# EAGLE board AD5330_Breakout-Panel-v12 (EAGLE 6.5.0), part 1 of 2
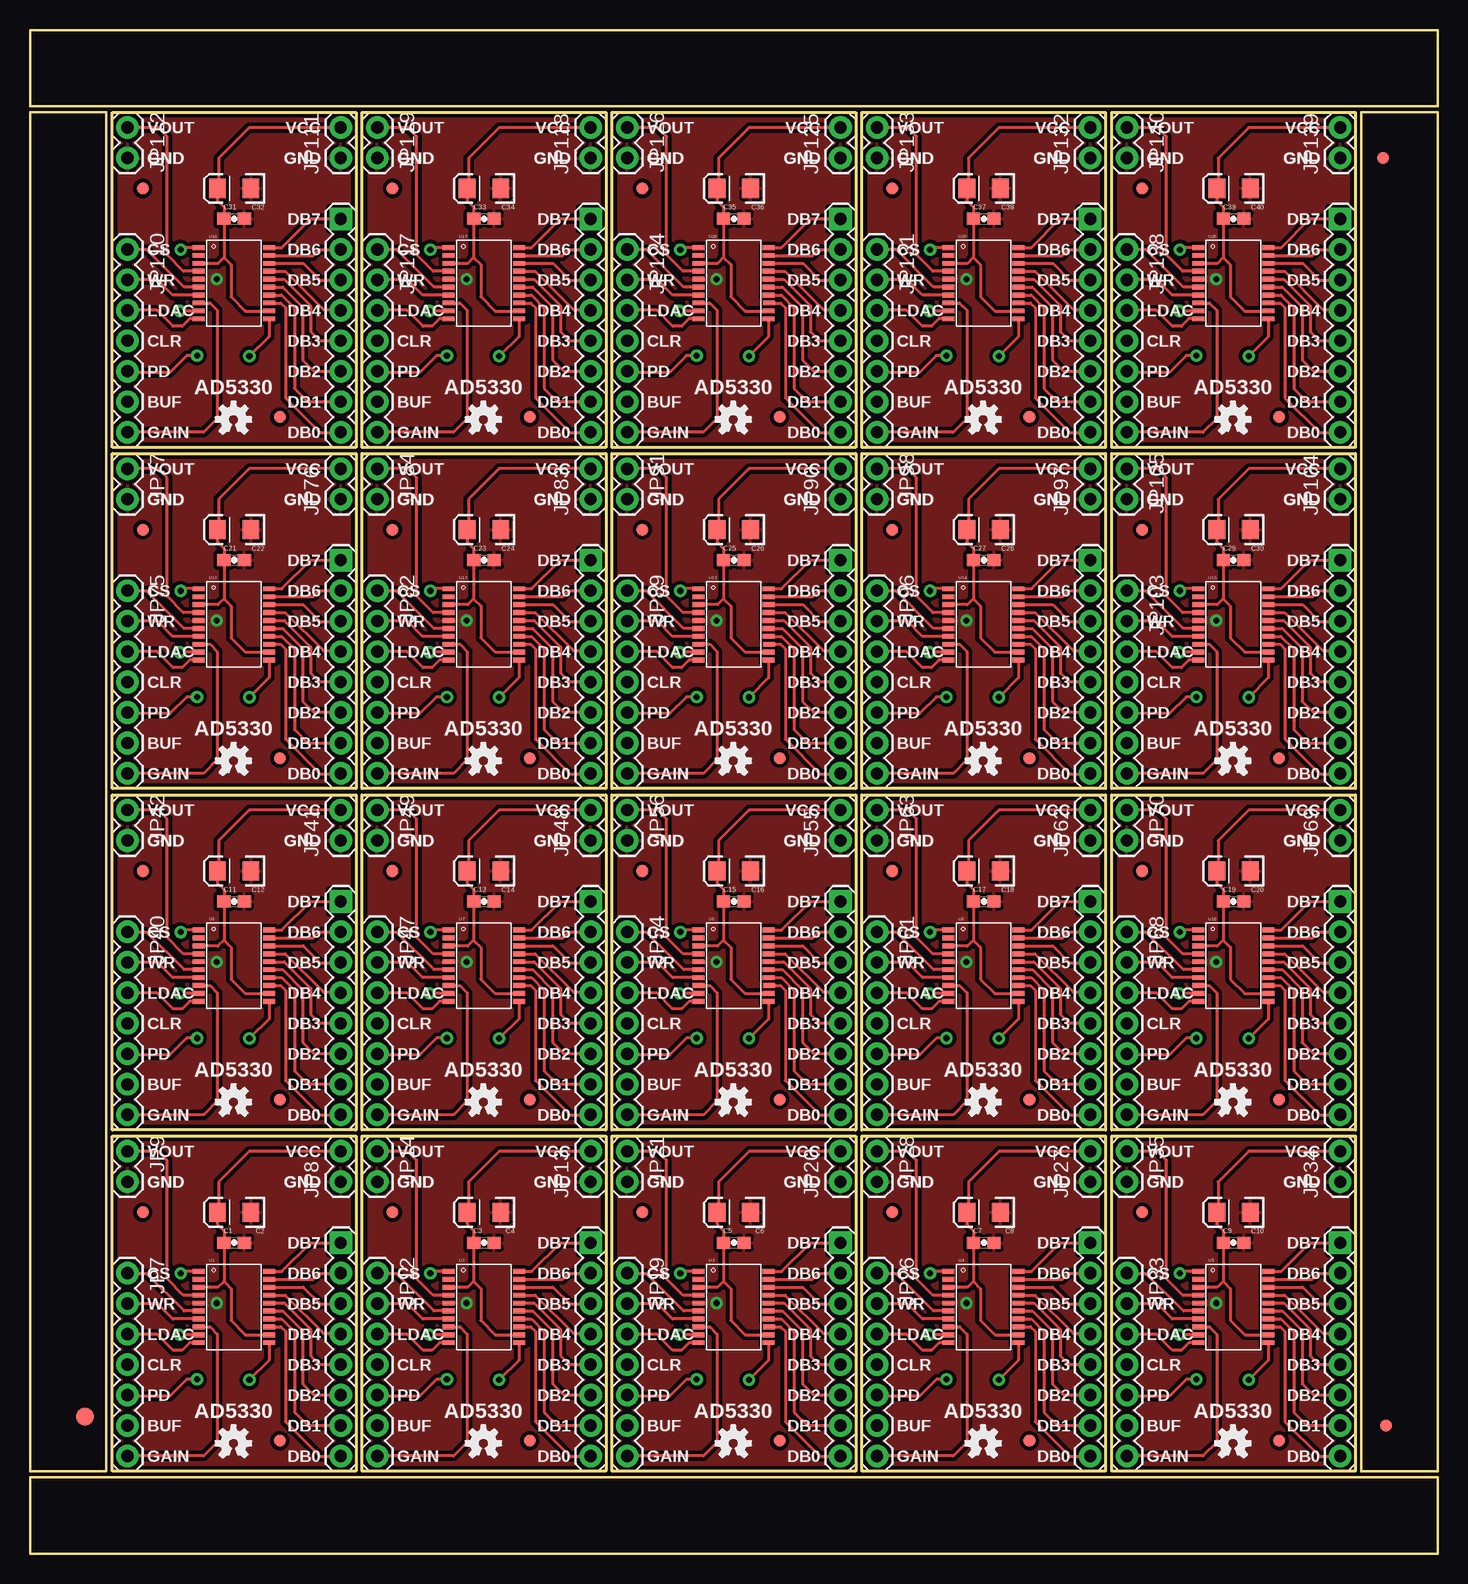
[diagram p0: board, top side]
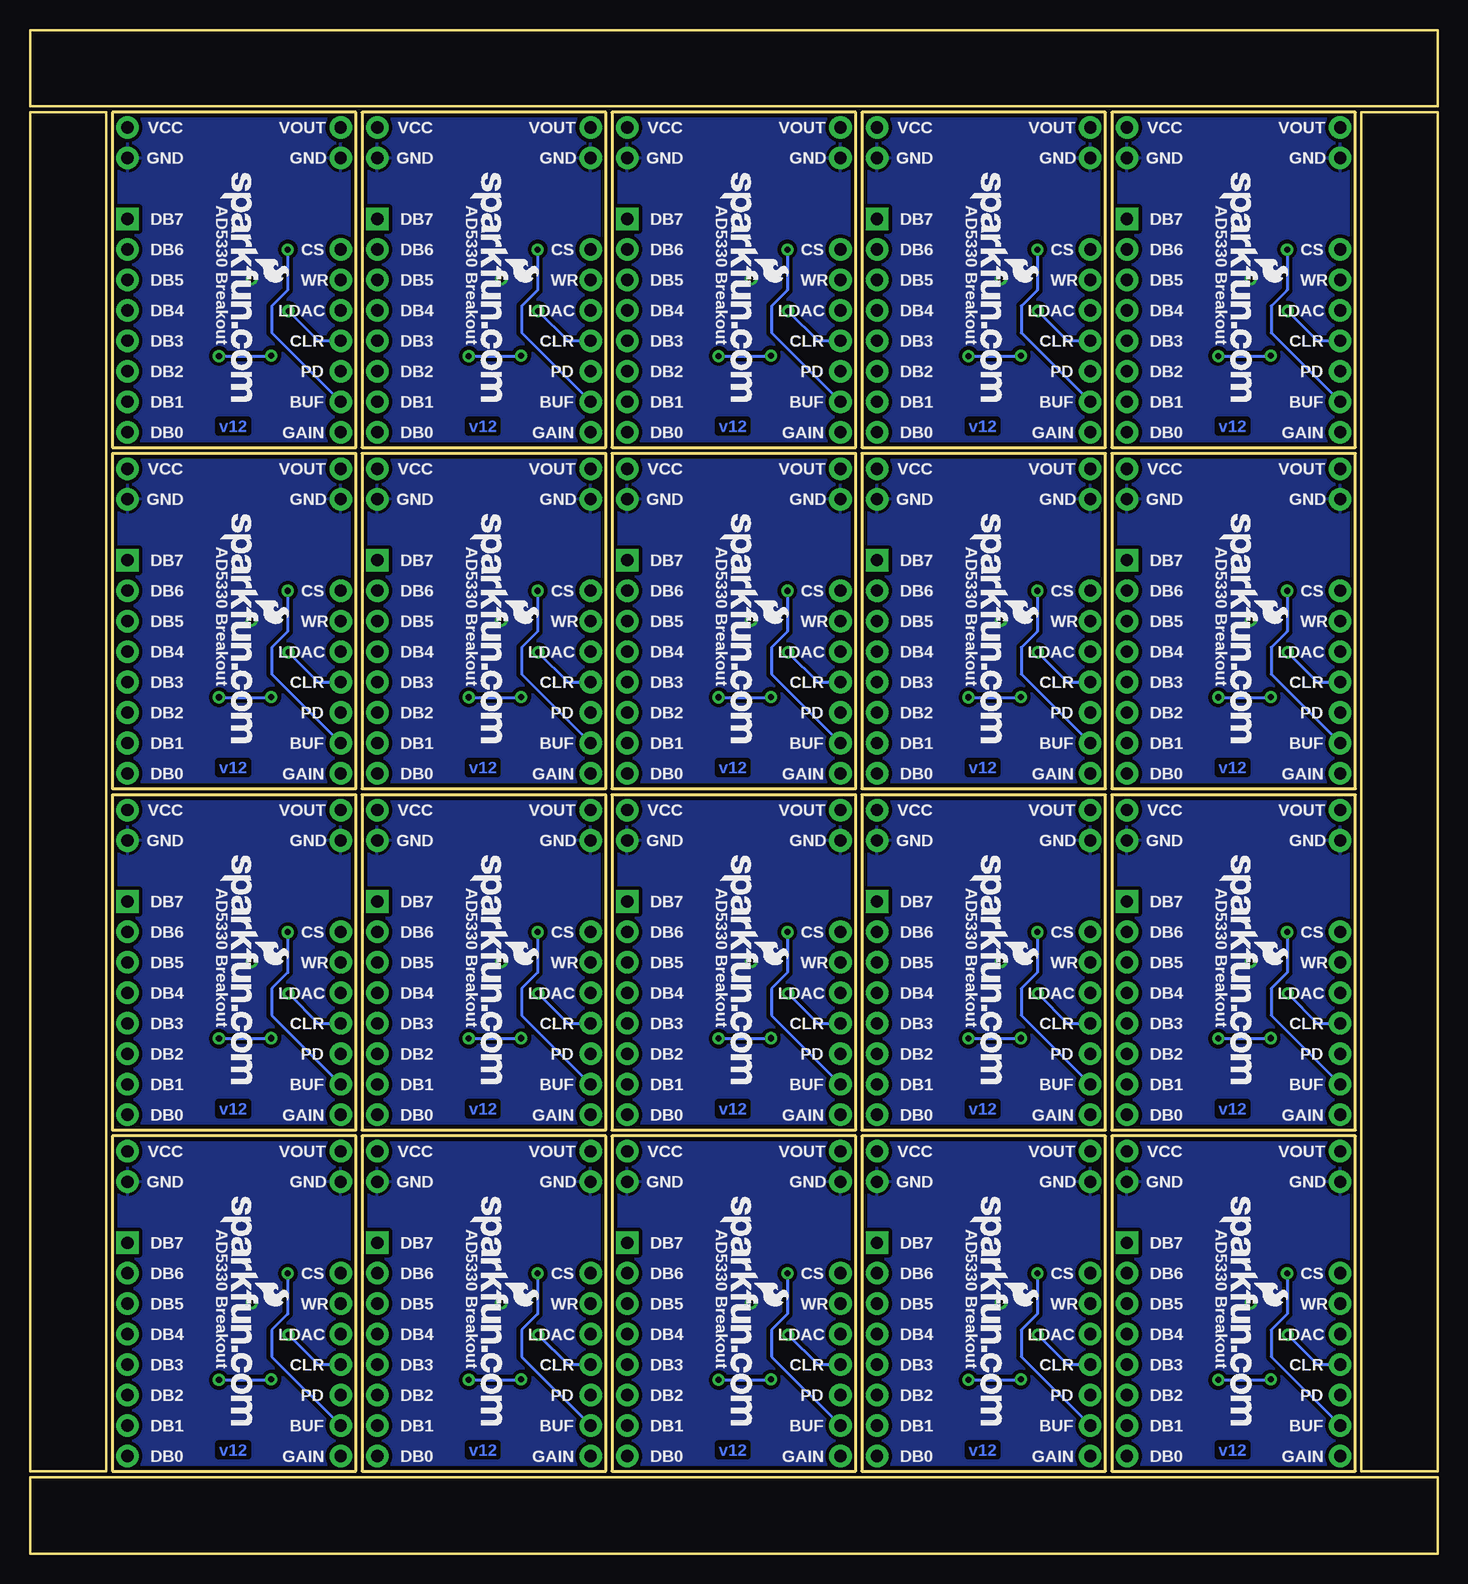
[diagram p1: board, bottom side, seen from below]

Size 117.35 x 127 mm. Coordinates in mm from the lower left corner, seen from the top.
Outline: 29.72,6.35 0,6.35 0,0 117.35,0 117.35,6.35 21.59,6.35
Outline: 87.63,120.65 117.35,120.65 117.35,127 0,127 0,120.65 95.76,120.65
Outline: 6.86,6.86 6.86,34.8 27.18,34.8 27.18,6.86 6.86,6.86
Outline: 27.69,6.86 27.69,34.8 48.01,34.8 48.01,6.86 27.69,6.86
Outline: 48.51,6.86 48.51,34.8 68.83,34.8 68.83,6.86 48.51,6.86
Outline: 69.34,6.86 69.34,34.8 89.66,34.8 89.66,6.86 69.34,6.86
Outline: 90.17,6.86 90.17,34.8 110.49,34.8 110.49,6.86 90.17,6.86
Outline: 6.86,35.31 6.86,63.25 27.18,63.25 27.18,35.31 6.86,35.31
Outline: 27.69,35.31 27.69,63.25 48.01,63.25 48.01,35.31 27.69,35.31
Outline: 48.51,35.31 48.51,63.25 68.83,63.25 68.83,35.31 48.51,35.31
Outline: 69.34,35.31 69.34,63.25 89.66,63.25 89.66,35.31 69.34,35.31
Outline: 90.17,35.31 90.17,63.25 110.49,63.25 110.49,35.31 90.17,35.31
Outline: 6.86,63.75 6.86,91.69 27.18,91.69 27.18,63.75 6.86,63.75
Outline: 27.69,63.75 27.69,91.69 48.01,91.69 48.01,63.75 27.69,63.75
Outline: 48.51,63.75 48.51,91.69 68.83,91.69 68.83,63.75 48.51,63.75
Outline: 69.34,63.75 69.34,91.69 89.66,91.69 89.66,63.75 69.34,63.75
Outline: 90.17,63.75 90.17,91.69 110.49,91.69 110.49,63.75 90.17,63.75
Outline: 6.86,92.2 6.86,120.14 27.18,120.14 27.18,92.2 6.86,92.2
Outline: 27.69,92.2 27.69,120.14 48.01,120.14 48.01,92.2 27.69,92.2
Outline: 48.51,92.2 48.51,120.14 68.83,120.14 68.83,92.2 48.51,92.2
Outline: 69.34,92.2 69.34,120.14 89.66,120.14 89.66,92.2 69.34,92.2
Outline: 90.17,92.2 90.17,120.14 110.49,120.14 110.49,92.2 90.17,92.2
Outline: 6.35,6.86 6.35,120.14 0,120.14 0,6.86 6.35,6.86
Outline: 117.35,6.86 117.35,120.14 111,120.14 111,6.86 117.35,6.86
Copper layers (1*16): Top 0.035mm / dielectric 1.5mm / Bottom 0.035mm
Design rules "SparkFun *": minimum track width 8mil, minimum drill 20mil, track to track 8mil, track to pad 8mil, pad to pad 8mil, via to via 8mil, smd to smd 8mil, copper to edge 8mil, drill to drill 8mil, minimum pad ring 12mil, minimum via ring 10mil, stop-mask expansion 4mil, vias tented up to drill 20mil, thermal gap 10mil

## Footprints (pad centres in the part's own frame; a part is rotated, then mirrored left to right if it is on the bottom)
0603-CAP = smd 1.1 x 1: 1 -0.85,0; 2 0.85,0
EIA3216 = smd 1.4 x 1.6: A 1.4,0; C -1.4,0
FIDUCIAL-1.5X3 = smd 1.5 x 1.5: 1 0,0
FIDUCIAL-1X2 = smd 1 x 1: 1 0,0
1X08 = drill 1.016 pad 1.88 square: 1 0,0 | drill 1.016 pad 1.88: 2 2.54,0; 3 5.08,0; 4 7.62,0; 5 10.16,0; 6 12.7,0; 7 15.24,0; 8 17.78,0
1X07 = drill 1.016 pad 1.88: 1 0,0; 2 2.54,0; 3 5.08,0; 4 7.62,0; 5 10.16,0; 6 12.7,0; 7 15.24,0
1X02 = drill 1.016 pad 1.88: 1 0,0; 2 2.54,0
TSSOP20 = smd 1 x 0.4: 1 -2.937,2.693; 2 -2.937,2.032; 3 -2.937,1.372; 4 -2.937,0.712; 5 -2.937,0.051; 6 -2.937,-0.609; 7 -2.937,-1.27; 8 -2.943,-1.93; 9 -2.937,-2.59; 10 -2.937,-3.251; 11 2.905,-3.251; 12 2.905,-2.59; 13 2.911,-1.93; 14 2.905,-1.27; 15 2.905,-0.609; 16 2.905,0.051; 17 2.905,0.712; 18 2.905,1.372; 19 2.905,2.032; 20 2.905,2.693

## Placement (x,y rotation side)
C1  0.1uF  [0603-CAP]  17.02,25.91 0 top
C2  10uF  [EIA3216]  17.02,28.45 180 top
C3  0.1uF  [0603-CAP]  37.85,25.91 0 top
C4  10uF  [EIA3216]  37.85,28.45 180 top
C5  0.1uF  [0603-CAP]  58.67,25.91 0 top
C6  10uF  [EIA3216]  58.67,28.45 180 top
C7  0.1uF  [0603-CAP]  79.5,25.91 0 top
C8  10uF  [EIA3216]  79.5,28.45 180 top
C9  0.1uF  [0603-CAP]  100.33,25.91 0 top
C10  10uF  [EIA3216]  100.33,28.45 180 top
C11  0.1uF  [0603-CAP]  17.02,54.36 0 top
C12  10uF  [EIA3216]  17.02,56.9 180 top
C13  0.1uF  [0603-CAP]  37.85,54.36 0 top
C14  10uF  [EIA3216]  37.85,56.9 180 top
C15  0.1uF  [0603-CAP]  58.67,54.36 0 top
C16  10uF  [EIA3216]  58.67,56.9 180 top
C17  0.1uF  [0603-CAP]  79.5,54.36 0 top
C18  10uF  [EIA3216]  79.5,56.9 180 top
C19  0.1uF  [0603-CAP]  100.33,54.36 0 top
C20  10uF  [EIA3216]  100.33,56.9 180 top
C21  0.1uF  [0603-CAP]  17.02,82.8 0 top
C22  10uF  [EIA3216]  17.02,85.34 180 top
C23  0.1uF  [0603-CAP]  37.85,82.8 0 top
C24  10uF  [EIA3216]  37.85,85.34 180 top
C25  0.1uF  [0603-CAP]  58.67,82.8 0 top
C26  10uF  [EIA3216]  58.67,85.34 180 top
C27  0.1uF  [0603-CAP]  79.5,82.8 0 top
C28  10uF  [EIA3216]  79.5,85.34 180 top
C29  0.1uF  [0603-CAP]  100.33,82.8 0 top
C30  10uF  [EIA3216]  100.33,85.34 180 top
C31  0.1uF  [0603-CAP]  17.02,111.25 0 top
C32  10uF  [EIA3216]  17.02,113.79 180 top
C33  0.1uF  [0603-CAP]  37.85,111.25 0 top
C34  10uF  [EIA3216]  37.85,113.79 180 top
C35  0.1uF  [0603-CAP]  58.67,111.25 0 top
C36  10uF  [EIA3216]  58.67,113.79 180 top
C37  0.1uF  [0603-CAP]  79.5,111.25 0 top
C38  10uF  [EIA3216]  79.5,113.79 180 top
C39  0.1uF  [0603-CAP]  100.33,111.25 0 top
C40  10uF  [EIA3216]  100.33,113.79 180 top
E$1  [FIDUCIAL-1.5X3]  4.57,11.43 0 top
E$4  [FIDUCIAL-1X2]  113.03,10.67 0 top
E$5  [FIDUCIAL-1X2]  112.78,116.33 180 top
JP1  LOGO-SFENEW  [SFE-NEW-WEBLOGO]  18.16,29.72 270 bottom
JP2  FIDUCIAL1X2  [FIDUCIAL-1X2]  9.4,28.45 0 top
JP3  FIDUCIAL1X2  [FIDUCIAL-1X2]  20.83,9.4 0 top
JP4  LOGO-SFENEW  [SFE-NEW-WEBLOGO]  38.99,29.72 270 bottom
JP5  FIDUCIAL1X2  [FIDUCIAL-1X2]  30.23,28.45 0 top
JP6  [1X08]  25.91,25.91 270 top
JP7  [1X07]  8.13,23.37 270 top
JP8  [1X02]  25.91,30.99 90 top
JP9  [1X02]  8.13,33.53 270 top
JP10  FIDUCIAL1X2  [FIDUCIAL-1X2]  41.66,9.4 0 top
JP11  [1X08]  46.74,25.91 270 top
JP12  [1X07]  28.96,23.37 270 top
JP13  [1X02]  46.74,30.99 90 top
JP14  [1X02]  28.96,33.53 270 top
JP15  LOGO-SFENEW  [SFE-NEW-WEBLOGO]  59.82,29.72 270 bottom
JP16  FIDUCIAL1X2  [FIDUCIAL-1X2]  51.05,28.45 0 top
JP17  FIDUCIAL1X2  [FIDUCIAL-1X2]  62.48,9.4 0 top
JP18  [1X08]  67.56,25.91 270 top
JP19  [1X07]  49.78,23.37 270 top
JP20  [1X02]  67.56,30.99 90 top
JP21  [1X02]  49.78,33.53 270 top
JP22  LOGO-SFENEW  [SFE-NEW-WEBLOGO]  80.64,29.72 270 bottom
JP23  FIDUCIAL1X2  [FIDUCIAL-1X2]  71.88,28.45 0 top
JP24  FIDUCIAL1X2  [FIDUCIAL-1X2]  83.31,9.4 0 top
JP25  [1X08]  88.39,25.91 270 top
JP26  [1X07]  70.61,23.37 270 top
JP27  [1X02]  88.39,30.99 90 top
JP28  [1X02]  70.61,33.53 270 top
JP29  LOGO-SFENEW  [SFE-NEW-WEBLOGO]  101.47,29.72 270 bottom
JP30  FIDUCIAL1X2  [FIDUCIAL-1X2]  92.71,28.45 0 top
JP31  FIDUCIAL1X2  [FIDUCIAL-1X2]  104.14,9.4 0 top
JP32  [1X08]  109.22,25.91 270 top
JP33  [1X07]  91.44,23.37 270 top
JP34  [1X02]  109.22,30.99 90 top
JP35  [1X02]  91.44,33.53 270 top
JP36  LOGO-SFENEW  [SFE-NEW-WEBLOGO]  18.16,58.17 270 bottom
JP37  FIDUCIAL1X2  [FIDUCIAL-1X2]  9.4,56.9 0 top
JP38  FIDUCIAL1X2  [FIDUCIAL-1X2]  20.83,37.85 0 top
JP39  [1X08]  25.91,54.36 270 top
JP40  [1X07]  8.13,51.82 270 top
JP41  [1X02]  25.91,59.44 90 top
JP42  [1X02]  8.13,61.98 270 top
JP43  LOGO-SFENEW  [SFE-NEW-WEBLOGO]  38.99,58.17 270 bottom
JP44  FIDUCIAL1X2  [FIDUCIAL-1X2]  30.23,56.9 0 top
JP45  FIDUCIAL1X2  [FIDUCIAL-1X2]  41.66,37.85 0 top
JP46  [1X08]  46.74,54.36 270 top
JP47  [1X07]  28.96,51.82 270 top
JP48  [1X02]  46.74,59.44 90 top
JP49  [1X02]  28.96,61.98 270 top
JP50  LOGO-SFENEW  [SFE-NEW-WEBLOGO]  59.82,58.17 270 bottom
JP51  FIDUCIAL1X2  [FIDUCIAL-1X2]  51.05,56.9 0 top
JP52  FIDUCIAL1X2  [FIDUCIAL-1X2]  62.48,37.85 0 top
JP53  [1X08]  67.56,54.36 270 top
JP54  [1X07]  49.78,51.82 270 top
JP55  [1X02]  67.56,59.44 90 top
JP56  [1X02]  49.78,61.98 270 top
JP57  LOGO-SFENEW  [SFE-NEW-WEBLOGO]  80.64,58.17 270 bottom
JP58  FIDUCIAL1X2  [FIDUCIAL-1X2]  71.88,56.9 0 top
JP59  FIDUCIAL1X2  [FIDUCIAL-1X2]  83.31,37.85 0 top
JP60  [1X08]  88.39,54.36 270 top
JP61  [1X07]  70.61,51.82 270 top
JP62  [1X02]  88.39,59.44 90 top
JP63  [1X02]  70.61,61.98 270 top
JP64  LOGO-SFENEW  [SFE-NEW-WEBLOGO]  101.47,58.17 270 bottom
JP65  FIDUCIAL1X2  [FIDUCIAL-1X2]  92.71,56.9 0 top
JP66  FIDUCIAL1X2  [FIDUCIAL-1X2]  104.14,37.85 0 top
JP67  [1X08]  109.22,54.36 270 top
JP68  [1X07]  91.44,51.82 270 top
JP69  [1X02]  109.22,59.44 90 top
JP70  [1X02]  91.44,61.98 270 top
JP71  LOGO-SFENEW  [SFE-NEW-WEBLOGO]  18.16,86.61 270 bottom
JP72  FIDUCIAL1X2  [FIDUCIAL-1X2]  9.4,85.34 0 top
JP73  FIDUCIAL1X2  [FIDUCIAL-1X2]  20.83,66.29 0 top
JP74  [1X08]  25.91,82.8 270 top
JP75  [1X07]  8.13,80.26 270 top
JP76  [1X02]  25.91,87.88 90 top
JP77  [1X02]  8.13,90.42 270 top
JP78  LOGO-SFENEW  [SFE-NEW-WEBLOGO]  38.99,86.61 270 bottom
JP79  FIDUCIAL1X2  [FIDUCIAL-1X2]  30.23,85.34 0 top
JP80  FIDUCIAL1X2  [FIDUCIAL-1X2]  41.66,66.29 0 top
JP81  [1X08]  46.74,82.8 270 top
JP82  [1X07]  28.96,80.26 270 top
JP83  [1X02]  46.74,87.88 90 top
JP84  [1X02]  28.96,90.42 270 top
JP85  LOGO-SFENEW  [SFE-NEW-WEBLOGO]  59.82,86.61 270 bottom
JP86  FIDUCIAL1X2  [FIDUCIAL-1X2]  51.05,85.34 0 top
JP87  FIDUCIAL1X2  [FIDUCIAL-1X2]  62.48,66.29 0 top
JP88  [1X08]  67.56,82.8 270 top
JP89  [1X07]  49.78,80.26 270 top
JP90  [1X02]  67.56,87.88 90 top
JP91  [1X02]  49.78,90.42 270 top
JP92  LOGO-SFENEW  [SFE-NEW-WEBLOGO]  80.64,86.61 270 bottom
JP93  FIDUCIAL1X2  [FIDUCIAL-1X2]  71.88,85.34 0 top
JP94  FIDUCIAL1X2  [FIDUCIAL-1X2]  83.31,66.29 0 top
JP95  [1X08]  88.39,82.8 270 top
JP96  [1X07]  70.61,80.26 270 top
JP97  [1X02]  88.39,87.88 90 top
JP98  [1X02]  70.61,90.42 270 top
JP99  LOGO-SFENEW  [SFE-NEW-WEBLOGO]  101.47,86.61 270 bottom
JP100  FIDUCIAL1X2  [FIDUCIAL-1X2]  92.71,85.34 0 top
JP101  FIDUCIAL1X2  [FIDUCIAL-1X2]  104.14,66.29 0 top
JP102  [1X08]  109.22,82.8 270 top
JP103  [1X07]  91.44,80.26 270 top
JP104  [1X02]  109.22,87.88 90 top
JP105  [1X02]  91.44,90.42 270 top
JP106  LOGO-SFENEW  [SFE-NEW-WEBLOGO]  18.16,115.06 270 bottom
JP107  FIDUCIAL1X2  [FIDUCIAL-1X2]  9.4,113.79 0 top
JP108  FIDUCIAL1X2  [FIDUCIAL-1X2]  20.83,94.74 0 top
JP109  [1X08]  25.91,111.25 270 top
JP110  [1X07]  8.13,108.71 270 top
JP111  [1X02]  25.91,116.33 90 top
JP112  [1X02]  8.13,118.87 270 top
JP113  LOGO-SFENEW  [SFE-NEW-WEBLOGO]  38.99,115.06 270 bottom
JP114  FIDUCIAL1X2  [FIDUCIAL-1X2]  30.23,113.79 0 top
JP115  FIDUCIAL1X2  [FIDUCIAL-1X2]  41.66,94.74 0 top
JP116  [1X08]  46.74,111.25 270 top
JP117  [1X07]  28.96,108.71 270 top
JP118  [1X02]  46.74,116.33 90 top
JP119  [1X02]  28.96,118.87 270 top
JP120  LOGO-SFENEW  [SFE-NEW-WEBLOGO]  59.82,115.06 270 bottom
JP121  FIDUCIAL1X2  [FIDUCIAL-1X2]  51.05,113.79 0 top
JP122  FIDUCIAL1X2  [FIDUCIAL-1X2]  62.48,94.74 0 top
JP123  [1X08]  67.56,111.25 270 top
JP124  [1X07]  49.78,108.71 270 top
JP125  [1X02]  67.56,116.33 90 top
JP126  [1X02]  49.78,118.87 270 top
JP127  LOGO-SFENEW  [SFE-NEW-WEBLOGO]  80.64,115.06 270 bottom
JP128  FIDUCIAL1X2  [FIDUCIAL-1X2]  71.88,113.79 0 top
JP129  FIDUCIAL1X2  [FIDUCIAL-1X2]  83.31,94.74 0 top
JP130  [1X08]  88.39,111.25 270 top
JP131  [1X07]  70.61,108.71 270 top
JP132  [1X02]  88.39,116.33 90 top
JP133  [1X02]  70.61,118.87 270 top
JP134  LOGO-SFENEW  [SFE-NEW-WEBLOGO]  101.47,115.06 270 bottom
JP135  FIDUCIAL1X2  [FIDUCIAL-1X2]  92.71,113.79 0 top
JP136  FIDUCIAL1X2  [FIDUCIAL-1X2]  104.14,94.74 0 top
JP137  [1X08]  109.22,111.25 270 top
JP138  [1X07]  91.44,108.71 270 top
JP139  [1X02]  109.22,116.33 90 top
JP140  [1X02]  91.44,118.87 270 top
LOGO1  OSHW-LOGOS  [OSHW-LOGO-S]  16.97,9.18 0 top
LOGO2  OSHW-LOGOS  [OSHW-LOGO-S]  37.8,9.18 0 top
LOGO3  OSHW-LOGOS  [OSHW-LOGO-S]  58.62,9.18 0 top
LOGO4  OSHW-LOGOS  [OSHW-LOGO-S]  79.45,9.18 0 top
LOGO5  OSHW-LOGOS  [OSHW-LOGO-S]  100.28,9.18 0 top
LOGO6  OSHW-LOGOS  [OSHW-LOGO-S]  16.97,37.63 0 top
LOGO7  OSHW-LOGOS  [OSHW-LOGO-S]  37.8,37.63 0 top
LOGO8  OSHW-LOGOS  [OSHW-LOGO-S]  58.62,37.63 0 top
LOGO9  OSHW-LOGOS  [OSHW-LOGO-S]  79.45,37.63 0 top
LOGO10  OSHW-LOGOS  [OSHW-LOGO-S]  100.28,37.63 0 top
LOGO11  OSHW-LOGOS  [OSHW-LOGO-S]  16.97,66.08 0 top
LOGO12  OSHW-LOGOS  [OSHW-LOGO-S]  37.8,66.08 0 top
LOGO13  OSHW-LOGOS  [OSHW-LOGO-S]  58.62,66.08 0 top
LOGO14  OSHW-LOGOS  [OSHW-LOGO-S]  79.45,66.08 0 top
LOGO15  OSHW-LOGOS  [OSHW-LOGO-S]  100.28,66.08 0 top
LOGO16  OSHW-LOGOS  [OSHW-LOGO-S]  16.97,94.53 0 top
LOGO17  OSHW-LOGOS  [OSHW-LOGO-S]  37.8,94.53 0 top
LOGO18  OSHW-LOGOS  [OSHW-LOGO-S]  58.62,94.53 0 top
LOGO19  OSHW-LOGOS  [OSHW-LOGO-S]  79.45,94.53 0 top
LOGO20  OSHW-LOGOS  [OSHW-LOGO-S]  100.28,94.53 0 top
U1  AD5330  [TSSOP20]  17.02,20.83 0 top
U2  AD5330  [TSSOP20]  37.85,20.83 0 top
U3  AD5330  [TSSOP20]  58.67,20.83 0 top
U4  AD5330  [TSSOP20]  79.5,20.83 0 top
U5  AD5330  [TSSOP20]  100.33,20.83 0 top
U6  AD5330  [TSSOP20]  17.02,49.28 0 top
U7  AD5330  [TSSOP20]  37.85,49.28 0 top
U8  AD5330  [TSSOP20]  58.67,49.28 0 top
U9  AD5330  [TSSOP20]  79.5,49.28 0 top
U10  AD5330  [TSSOP20]  100.33,49.28 0 top
U11  AD5330  [TSSOP20]  17.02,77.72 0 top
U12  AD5330  [TSSOP20]  37.85,77.72 0 top
U13  AD5330  [TSSOP20]  58.67,77.72 0 top
U14  AD5330  [TSSOP20]  79.5,77.72 0 top
U15  AD5330  [TSSOP20]  100.33,77.72 0 top
U16  AD5330  [TSSOP20]  17.02,106.17 0 top
U17  AD5330  [TSSOP20]  37.85,106.17 0 top
U18  AD5330  [TSSOP20]  58.67,106.17 0 top
U19  AD5330  [TSSOP20]  79.5,106.17 0 top
U20  AD5330  [TSSOP20]  100.33,106.17 0 top

## Library data of the parts
C1 C3 C5 C7 C9 C11 C13 C15 C17 C19 C21 C23 C25 C27 C29 C31 C33 C35 C37 C39 = SparkFun-Capacitors; PROD_ID: CAP-00810
C2 C4 C6 C8 C10 C12 C14 C16 C18 C20 C22 C24 C26 C28 C30 C32 C34 C36 C38 C40 = SparkFun-Capacitors; PROD_ID: CAP-00811
E$1 E$4 E$5 LOGO1-LOGO20 = SparkFun-Aesthetics
JP1-JP140 U1-U20 = SparkFun

## Nets
BUF: JP7.6 U1.1
BUF1: JP12.6 U2.1
BUF2: JP19.6 U3.1
BUF3: JP26.6 U4.1
BUF4: JP33.6 U5.1
BUF5: JP40.6 U6.1
BUF6: JP47.6 U7.1
BUF7: JP54.6 U8.1
BUF8: JP61.6 U9.1
BUF9: JP68.6 U10.1
BUF10: JP75.6 U11.1
BUF11: JP82.6 U12.1
BUF12: JP89.6 U13.1
BUF13: JP96.6 U14.1
BUF14: JP103.6 U15.1
BUF15: JP110.6 U16.1
BUF16: JP117.6 U17.1
BUF17: JP124.6 U18.1
BUF18: JP131.6 U19.1
BUF19: JP138.6 U20.1
CLR: JP7.4 U1.9
CLR1: JP12.4 U2.9
CLR2: JP19.4 U3.9
CLR3: JP26.4 U4.9
CLR4: JP33.4 U5.9
CLR5: JP40.4 U6.9
CLR6: JP47.4 U7.9
CLR7: JP54.4 U8.9
CLR8: JP61.4 U9.9
CLR9: JP68.4 U10.9
CLR10: JP75.4 U11.9
CLR11: JP82.4 U12.9
CLR12: JP89.4 U13.9
CLR13: JP96.4 U14.9
CLR14: JP103.4 U15.9
CLR15: JP110.4 U16.9
CLR16: JP117.4 U17.9
CLR17: JP124.4 U18.9
CLR18: JP131.4 U19.9
CLR19: JP138.4 U20.9
CS: JP7.1 U1.6
CS1: JP12.1 U2.6
CS2: JP19.1 U3.6
CS3: JP26.1 U4.6
CS4: JP33.1 U5.6
CS5: JP40.1 U6.6
CS6: JP47.1 U7.6
CS7: JP54.1 U8.6
CS8: JP61.1 U9.6
CS9: JP68.1 U10.6
CS10: JP75.1 U11.6
CS11: JP82.1 U12.6
CS12: JP89.1 U13.6
CS13: JP96.1 U14.6
CS14: JP103.1 U15.6
CS15: JP110.1 U16.6
CS16: JP117.1 U17.6
CS17: JP124.1 U18.6
CS18: JP131.1 U19.6
CS19: JP138.1 U20.6
DB0: JP6.8 U1.13
DB1: JP6.7 U1.14
DB2: JP6.6 U1.15
DB3: JP6.5 U1.16
DB4: JP6.4 U1.17
DB5: JP6.3 U1.18
DB6: JP6.2 U1.19
DB7: JP6.1 U1.20
DB8: JP11.8 U2.13
DB9: JP11.7 U2.14
DB10: JP11.6 U2.15
DB11: JP11.5 U2.16
DB12: JP11.4 U2.17
DB13: JP11.3 U2.18
DB14: JP11.2 U2.19
DB15: JP11.1 U2.20
DB16: JP18.8 U3.13
DB17: JP18.7 U3.14
DB18: JP18.6 U3.15
DB19: JP18.5 U3.16
DB20: JP18.4 U3.17
DB21: JP18.3 U3.18
DB22: JP18.2 U3.19
DB23: JP18.1 U3.20
DB24: JP25.8 U4.13
DB25: JP25.7 U4.14
DB26: JP25.6 U4.15
DB27: JP25.5 U4.16
DB28: JP25.4 U4.17
DB29: JP25.3 U4.18
DB30: JP25.2 U4.19
DB31: JP25.1 U4.20
DB32: JP32.8 U5.13
DB33: JP32.7 U5.14
DB34: JP32.6 U5.15
DB35: JP32.5 U5.16
DB36: JP32.4 U5.17
DB37: JP32.3 U5.18
DB38: JP32.2 U5.19
DB39: JP32.1 U5.20
DB40: JP39.8 U6.13
DB41: JP39.7 U6.14
DB42: JP39.6 U6.15
DB43: JP39.5 U6.16
DB44: JP39.4 U6.17
DB45: JP39.3 U6.18
DB46: JP39.2 U6.19
DB47: JP39.1 U6.20
DB48: JP46.8 U7.13
DB49: JP46.7 U7.14
DB50: JP46.6 U7.15
DB51: JP46.5 U7.16
DB52: JP46.4 U7.17
DB53: JP46.3 U7.18
DB54: JP46.2 U7.19
DB55: JP46.1 U7.20
DB56: JP53.8 U8.13
DB57: JP53.7 U8.14
DB58: JP53.6 U8.15
DB59: JP53.5 U8.16
DB60: JP53.4 U8.17
DB61: JP53.3 U8.18
DB62: JP53.2 U8.19
DB63: JP53.1 U8.20
DB64: JP60.8 U9.13
DB65: JP60.7 U9.14
DB66: JP60.6 U9.15
DB67: JP60.5 U9.16
DB68: JP60.4 U9.17
DB69: JP60.3 U9.18
DB70: JP60.2 U9.19
DB71: JP60.1 U9.20
DB72: JP67.8 U10.13
DB73: JP67.7 U10.14
DB74: JP67.6 U10.15
DB75: JP67.5 U10.16
DB76: JP67.4 U10.17
DB77: JP67.3 U10.18
DB78: JP67.2 U10.19
DB79: JP67.1 U10.20
DB80: JP74.8 U11.13
DB81: JP74.7 U11.14
DB82: JP74.6 U11.15
DB83: JP74.5 U11.16
DB84: JP74.4 U11.17
DB85: JP74.3 U11.18
DB86: JP74.2 U11.19
DB87: JP74.1 U11.20
DB88: JP81.8 U12.13
DB89: JP81.7 U12.14
DB90: JP81.6 U12.15
DB91: JP81.5 U12.16
DB92: JP81.4 U12.17
DB93: JP81.3 U12.18
DB94: JP81.2 U12.19
DB95: JP81.1 U12.20
DB96: JP88.8 U13.13
DB97: JP88.7 U13.14
DB98: JP88.6 U13.15
DB99: JP88.5 U13.16
DB100: JP88.4 U13.17
DB101: JP88.3 U13.18
DB102: JP88.2 U13.19
DB103: JP88.1 U13.20
DB104: JP95.8 U14.13
DB105: JP95.7 U14.14
DB106: JP95.6 U14.15
DB107: JP95.5 U14.16
DB108: JP95.4 U14.17
DB109: JP95.3 U14.18
DB110: JP95.2 U14.19
DB111: JP95.1 U14.20
DB112: JP102.8 U15.13
DB113: JP102.7 U15.14
DB114: JP102.6 U15.15
DB115: JP102.5 U15.16
DB116: JP102.4 U15.17
DB117: JP102.3 U15.18
DB118: JP102.2 U15.19
DB119: JP102.1 U15.20
DB120: JP109.8 U16.13
DB121: JP109.7 U16.14
DB122: JP109.6 U16.15
DB123: JP109.5 U16.16
DB124: JP109.4 U16.17
DB125: JP109.3 U16.18
DB126: JP109.2 U16.19
DB127: JP109.1 U16.20
DB128: JP116.8 U17.13
DB129: JP116.7 U17.14
DB130: JP116.6 U17.15
DB131: JP116.5 U17.16
DB132: JP116.4 U17.17
DB133: JP116.3 U17.18
DB134: JP116.2 U17.19
DB135: JP116.1 U17.20
DB136: JP123.8 U18.13
DB137: JP123.7 U18.14
DB138: JP123.6 U18.15
DB139: JP123.5 U18.16
DB140: JP123.4 U18.17
DB141: JP123.3 U18.18
DB142: JP123.2 U18.19
DB143: JP123.1 U18.20
DB144: JP130.8 U19.13
DB145: JP130.7 U19.14
DB146: JP130.6 U19.15
DB147: JP130.5 U19.16
DB148: JP130.4 U19.17
DB149: JP130.3 U19.18
DB150: JP130.2 U19.19
DB151: JP130.1 U19.20
DB152: JP137.8 U20.13
DB153: JP137.7 U20.14
DB154: JP137.6 U20.15
DB155: JP137.5 U20.16
DB156: JP137.4 U20.17
DB157: JP137.3 U20.18
DB158: JP137.2 U20.19
DB159: JP137.1 U20.20
GAIN: JP7.7 U1.8
GAIN1: JP12.7 U2.8
GAIN2: JP19.7 U3.8
GAIN3: JP26.7 U4.8
GAIN4: JP33.7 U5.8
GAIN5: JP40.7 U6.8
GAIN6: JP47.7 U7.8
GAIN7: JP54.7 U8.8
GAIN8: JP61.7 U9.8
GAIN9: JP68.7 U10.8
GAIN10: JP75.7 U11.8
GAIN11: JP82.7 U12.8
GAIN12: JP89.7 U13.8
GAIN13: JP96.7 U14.8
GAIN14: JP103.7 U15.8
GAIN15: JP110.7 U16.8
GAIN16: JP117.7 U17.8
GAIN17: JP124.7 U18.8
GAIN18: JP131.7 U19.8
GAIN19: JP138.7 U20.8
GND: C1.2 C2.C JP8.1 JP9.2 U1.5
GND1: C3.2 C4.C JP13.1 JP14.2 U2.5
GND2: C5.2 C6.C JP20.1 JP21.2 U3.5
GND3: C7.2 C8.C JP27.1 JP28.2 U4.5
GND4: C9.2 C10.C JP34.1 JP35.2 U5.5
GND5: C11.2 C12.C JP41.1 JP42.2 U6.5
GND6: C13.2 C14.C JP48.1 JP49.2 U7.5
GND7: C15.2 C16.C JP55.1 JP56.2 U8.5
GND8: C17.2 C18.C JP62.1 JP63.2 U9.5
GND9: C19.2 C20.C JP69.1 JP70.2 U10.5
GND10: C21.2 C22.C JP76.1 JP77.2 U11.5
GND11: C23.2 C24.C JP83.1 JP84.2 U12.5
GND12: C25.2 C26.C JP90.1 JP91.2 U13.5
GND13: C27.2 C28.C JP97.1 JP98.2 U14.5
GND14: C29.2 C30.C JP104.1 JP105.2 U15.5
GND15: C31.2 C32.C JP111.1 JP112.2 U16.5
GND16: C33.2 C34.C JP118.1 JP119.2 U17.5
GND17: C35.2 C36.C JP125.1 JP126.2 U18.5
GND18: C37.2 C38.C JP132.1 JP133.2 U19.5
GND19: C39.2 C40.C JP139.1 JP140.2 U20.5
LDAC: JP7.3 U1.10
LDAC1: JP12.3 U2.10
LDAC2: JP19.3 U3.10
LDAC3: JP26.3 U4.10
LDAC4: JP33.3 U5.10
LDAC5: JP40.3 U6.10
LDAC6: JP47.3 U7.10
LDAC7: JP54.3 U8.10
LDAC8: JP61.3 U9.10
LDAC9: JP68.3 U10.10
LDAC10: JP75.3 U11.10
LDAC11: JP82.3 U12.10
LDAC12: JP89.3 U13.10
LDAC13: JP96.3 U14.10
LDAC14: JP103.3 U15.10
LDAC15: JP110.3 U16.10
LDAC16: JP117.3 U17.10
LDAC17: JP124.3 U18.10
LDAC18: JP131.3 U19.10
LDAC19: JP138.3 U20.10
PD: JP7.5 U1.11
PD1: JP12.5 U2.11
PD2: JP19.5 U3.11
PD3: JP26.5 U4.11
PD4: JP33.5 U5.11
PD5: JP40.5 U6.11
PD6: JP47.5 U7.11
PD7: JP54.5 U8.11
PD8: JP61.5 U9.11
PD9: JP68.5 U10.11
PD10: JP75.5 U11.11
PD11: JP82.5 U12.11
PD12: JP89.5 U13.11
PD13: JP96.5 U14.11
PD14: JP103.5 U15.11
PD15: JP110.5 U16.11
PD16: JP117.5 U17.11
PD17: JP124.5 U18.11
PD18: JP131.5 U19.11
PD19: JP138.5 U20.11
VCC: C1.1 C2.A JP8.2 U1.3 U1.12
VCC1: C3.1 C4.A JP13.2 U2.3 U2.12
VCC2: C5.1 C6.A JP20.2 U3.3 U3.12
VCC3: C7.1 C8.A JP27.2 U4.3 U4.12
VCC4: C9.1 C10.A JP34.2 U5.3 U5.12
VCC5: C11.1 C12.A JP41.2 U6.3 U6.12
VCC6: C13.1 C14.A JP48.2 U7.3 U7.12
VCC7: C15.1 C16.A JP55.2 U8.3 U8.12
VCC8: C17.1 C18.A JP62.2 U9.3 U9.12
VCC9: C19.1 C20.A JP69.2 U10.3 U10.12
VCC10: C21.1 C22.A JP76.2 U11.3 U11.12
VCC11: C23.1 C24.A JP83.2 U12.3 U12.12
VCC12: C25.1 C26.A JP90.2 U13.3 U13.12
VCC13: C27.1 C28.A JP97.2 U14.3 U14.12
VCC14: C29.1 C30.A JP104.2 U15.3 U15.12
VCC15: C31.1 C32.A JP111.2 U16.3 U16.12
VCC16: C33.1 C34.A JP118.2 U17.3 U17.12
VCC17: C35.1 C36.A JP125.2 U18.3 U18.12
VCC18: C37.1 C38.A JP132.2 U19.3 U19.12
VCC19: C39.1 C40.A JP139.2 U20.3 U20.12
VOUT: JP9.1 U1.4
VOUT1: JP14.1 U2.4
VOUT2: JP21.1 U3.4
VOUT3: JP28.1 U4.4
VOUT4: JP35.1 U5.4
VOUT5: JP42.1 U6.4
VOUT6: JP49.1 U7.4
VOUT7: JP56.1 U8.4
VOUT8: JP63.1 U9.4
VOUT9: JP70.1 U10.4
VOUT10: JP77.1 U11.4
VOUT11: JP84.1 U12.4
VOUT12: JP91.1 U13.4
VOUT13: JP98.1 U14.4
VOUT14: JP105.1 U15.4
VOUT15: JP112.1 U16.4
VOUT16: JP119.1 U17.4
VOUT17: JP126.1 U18.4
VOUT18: JP133.1 U19.4
VOUT19: JP140.1 U20.4
WR: JP7.2 U1.7
WR1: JP12.2 U2.7
WR2: JP19.2 U3.7
WR3: JP26.2 U4.7
WR4: JP33.2 U5.7
WR5: JP40.2 U6.7
WR6: JP47.2 U7.7
WR7: JP54.2 U8.7
WR8: JP61.2 U9.7
WR9: JP68.2 U10.7
WR10: JP75.2 U11.7
WR11: JP82.2 U12.7
WR12: JP89.2 U13.7
WR13: JP96.2 U14.7
WR14: JP103.2 U15.7
WR15: JP110.2 U16.7
WR16: JP117.2 U17.7
WR17: JP124.2 U18.7
WR18: JP131.2 U19.7
WR19: JP138.2 U20.7